# EAGLE board CT_schematic (EAGLE 7.6.0)

Size 100 x 80 mm. Coordinates in mm from the lower left corner, seen from the top.
Outline: 0,0 100,0 100,80 0,80 0,0
Copper layers (1*16): Top 0.035mm / dielectric 1.5mm / Bottom 0.035mm
Design rules "default": minimum track width 10mil, minimum drill 24mil, track to track 8mil, track to pad 8mil, pad to pad 8mil, via to via 8mil, smd to smd 8mil, copper to edge 40mil, drill to drill 8mil, minimum pad ring 10mil, minimum via ring 8mil, stop-mask expansion 4mil, vias tented up to drill 0mil, thermal gap 10mil

## Footprints (pad centres in the part's own frame; a part is rotated, then mirrored left to right if it is on the bottom)
C0603 = smd 0.8 x 0.8: 1 -0.762,0; 2 0.762,0
C0402 = smd 0.5 x 0.5: 1 -0.508,0; 2 0.508,0
C0805 = smd 1.2 x 1.3: 1 -1.016,0; 2 1.016,0
C1210 = smd 1.2 x 2.5: 1 -1.524,0; 2 1.524,0
C1206 = smd 1.3 x 1.6: 1 -1.524,0; 2 1.524,0
DR1040 = smd 1.6 x 3.2: 1 -4.458,0; 2 4.458,0
L1210 = smd 1.2 x 2.5: 1 -1.524,0; 2 1.524,0
R0603 = smd 0.8 x 0.8: 1 -0.762,0; 2 0.762,0
LQFP100 = smd 0.3 x 1.2: 1 -6,-7.75; 2 -5.5,-7.75; 3 -5,-7.75; 4 -4.5,-7.75; 5 -4,-7.75; 6 -3.5,-7.75; 7 -3,-7.75; 8 -2.5,-7.75; 9 -2,-7.75; 10 -1.5,-7.75; 11 -1,-7.75; 12 -0.5,-7.75; 13 0,-7.75; 14 0.5,-7.75; 15 1,-7.75; 16 1.5,-7.75; 17 2,-7.75; 18 2.5,-7.75; 19 3,-7.75; 20 3.5,-7.75; 21 4,-7.75; 22 4.5,-7.75; 23 5,-7.75; 24 5.5,-7.75; 25 6,-7.75; 51 6,7.75; 52 5.5,7.75; 53 5,7.75; 54 4.5,7.75; 55 4,7.75; 56 3.5,7.75; 57 3,7.75; 58 2.5,7.75; 59 2,7.75; 60 1.5,7.75; 61 1,7.75; 62 0.5,7.75; 63 0,7.75; 64 -0.5,7.75; 65 -1,7.75; 66 -1.5,7.75; 67 -2,7.75; 68 -2.5,7.75; 69 -3,7.75; 70 -3.5,7.75; 71 -4,7.75; 72 -4.5,7.75; 73 -5,7.75; 74 -5.5,7.75; 75 -6,7.75 | smd 1.2 x 0.3: 26 7.75,-6; 27 7.75,-5.5; 28 7.75,-5; 29 7.75,-4.5; 30 7.75,-4; 31 7.75,-3.5; 32 7.75,-3; 33 7.75,-2.5; 34 7.75,-2; 35 7.75,-1.5; 36 7.75,-1; 37 7.75,-0.5; 38 7.75,0; 39 7.75,0.5; 40 7.75,1; 41 7.75,1.5; 42 7.75,2; 43 7.75,2.5; 44 7.75,3; 45 7.75,3.5; 46 7.75,4; 47 7.75,4.5; 48 7.75,5; 49 7.75,5.5; 50 7.75,6; 76 -7.75,6; 77 -7.75,5.5; 78 -7.75,5; 79 -7.75,4.5; 80 -7.75,4; 81 -7.75,3.5; 82 -7.75,3; 83 -7.75,2.5; 84 -7.75,2; 85 -7.75,1.5; 86 -7.75,1; 87 -7.75,0.5; 88 -7.75,0; 89 -7.75,-0.5; 90 -7.75,-1; 91 -7.75,-1.5; 92 -7.75,-2; 93 -7.75,-2.5; 94 -7.75,-3; 95 -7.75,-3.5; 96 -7.75,-4; 97 -7.75,-4.5; 98 -7.75,-5; 99 -7.75,-5.5; 100 -7.75,-6
A2200-A = smd 1.5 x 0.8: 1 -4.85,6.35; 2 -4.85,5.08; 3 -4.85,3.81; 4 -4.85,2.54; 5 -4.85,1.27; 6 -4.85,0; 7 -4.85,-1.27; 8 -4.85,-2.54; 9 -4.85,-3.81; 10 -4.85,-5.08; 11 -4.85,-6.35; 12 4.85,-6.35; 13 4.85,-5.08; 14 4.85,-3.81; 15 4.85,-2.54; 16 4.85,-1.27; 17 4.85,0; 18 4.85,1.27; 19 4.85,2.54; 20 4.85,3.81; 21 4.85,5.08; 22 4.85,6.35 | smd 1.2 x 1.2: 23 -2,2; 24 -2,0; 25 -2,-2; 26 0,-2; 27 0,0; 28 0,2; 29 2,2; 30 2,0; 31 2,-2
COAXIAL_C = smd 1 x 1: 1 0,-1.5; 2 0,1.5 | smd 1.05 x 2.2: 3 -1.475,0; 4 1.475,0
SOIC-8 = smd 1.6 x 0.6: 1 -2.7,1.905 | smd 1.55 x 0.6: 2 -2.7,0.635; 3 -2.7,-0.635; 4 -2.7,-1.905; 5 2.7,-1.905; 6 2.7,-0.635; 7 2.7,0.635; 8 2.7,1.905
SAMTEC_FTSH-105-01-L-DV-K = smd 0.762 x 2.794: 1 -2.54,-2.032; 2 -2.54,2.032; 3 -1.27,-2.032; 4 -1.27,2.032; 5 0,-2.032; 6 0,2.032; 7 1.27,-2.032; 8 1.27,2.032; 9 2.54,-2.032; 10 2.54,2.032
182-009-MALE = drill 1.194 pad 1.524 octagon: 1 -5.537,10.923; 2 -2.769,10.923; 3 0,10.923; 4 2.769,10.923; 5 5.537,10.923; 6 -4.153,8.08; 7 -1.384,8.08; 8 1.384,8.08; 9 4.153,8.08 | hole 3.048: -12.446,9.501; 12.446,9.501
SSOP-28 = smd 1.5 x 0.4: 1 -3.625,4.225; 2 -3.625,3.575; 3 -3.625,2.925; 4 -3.625,2.275; 5 -3.625,1.625; 6 -3.625,0.975; 7 -3.625,0.325; 8 -3.625,-0.325; 9 -3.625,-0.975; 10 -3.625,-1.625; 11 -3.625,-2.275; 12 -3.625,-2.925; 13 -3.625,-3.575; 14 -3.625,-4.225; 15 3.625,-4.225; 16 3.625,-3.575; 17 3.625,-2.925; 18 3.625,-2.275; 19 3.625,-1.625; 20 3.625,-0.975; 21 3.625,-0.325; 22 3.625,0.325; 23 3.625,0.975; 24 3.625,1.625; 25 3.625,2.275; 26 3.625,2.925; 27 3.625,3.575; 28 3.625,4.225
FCI_10118193-0001LF = smd 0.4 x 1.35: 1 -1.3,2.675; 2 -0.65,2.675; 3 0,2.675; 4 0.65,2.675; 5 1.3,2.675 | smd 1.6 x 1.4: 6 -3.2,2.45; 7 3.2,2.45 | smd 1.9 x 1.9: 8 -1.2,0; 9 1.2,0 | hole 0.5: -3.3,0; 3.3,0
SOT143B = smd 1 x 0.7: 1 -0.75,-1 | smd 0.6 x 0.7: 2 0.95,-1; 3 0.95,1; 4 -0.95,1
ABLS-25.000MHZ-B2F-T = smd 5.6 x 2.8: 1 -3.81,0; 2 5.69,0
ASEK = smd 1.4 x 1: 1 -1.1,-0.8; 2 1.1,-0.8; 3 1.1,0.8; 4 -1.1,0.8
TSOT-23-5 = smd 1.3 x 0.62: 1 -1.31,0.95; 2 -1.31,0; 3 -1.31,-0.95; 4 1.31,-0.95; 5 1.31,0.95
DFN-8_DDB = smd 0.805 x 0.3: 1 -0.952,0.75; 2 -0.952,0.25; 3 -0.952,-0.25; 4 -0.952,-0.75; 5 0.952,-0.75; 6 0.952,-0.25; 7 0.952,0.25; 8 0.952,0.75 | smd 0.61 x 2.2: 9 0,0
DFN8_2X3MC = smd 0.813 x 0.305: 1 -1.398,0.75; 2 -1.398,0.25; 3 -1.398,-0.25; 4 -1.398,-0.75; 5 1.398,-0.75; 6 1.398,-0.25; 7 1.398,0.25; 8 1.398,0.75 | smd 1.753 x 1.549: 9 0,0
JST-2-SMD = smd 1 x 4.6: 1 -1,-3.7; 2 1,-3.7 | smd 1.6 x 3.4: NC1 -3.4,1.5; NC2 3.4,1.5
SON-6 = smd 0.55 x 0.3: 1 -0.355,0.5 | smd 0.52 x 0.3: 2 -0.37,0; 3 -0.37,-0.5; 4 0.37,-0.5; 5 0.37,0; 6 0.37,0.5
SW_4-1437565-2 = smd 1.4 x 2.1: 1 -2.23,4.55; 2 -2.23,-4.55; 3 2.23,4.55; 4 2.23,-4.55
LGM67K-G1J2-24-Z = smd 0.8 x 1.4: A -2,0; C 0,0
NC7SZ125M5X = smd 1.3 x 0.7: 1 -1.3,0.95; 2 -1.3,0; 3 -1.3,-0.95; 4 1.3,-0.95; 5 1.3,0.95

## Placement (x,y rotation side)
C1  1e-06  [C0603]  -81.28,87.63 0 top  (outside the outline)
C2  1e-07  [C0603]  -85.09,87.63 0 top  (outside the outline)
C3  1e-07  [C0603]  -15.24,92.71 0 top  (outside the outline)
C4  1e-07  [C0603]  -19.05,92.71 0 top  (outside the outline)
C5  1e-07  [C0603]  -22.86,92.71 0 top  (outside the outline)
C6  1e-07  [C0603]  -26.67,92.71 0 top  (outside the outline)
C7  1e-07  [C0603]  -30.48,92.71 0 top  (outside the outline)
C8  4.7e-06  [C0603]  -69.85,87.63 0 top  (outside the outline)
C9  1e-07  [C0603]  -34.29,92.71 0 top  (outside the outline)
C10  1e-08  [C0603]  -38.1,92.71 0 top  (outside the outline)
C11  1e-06  [C0603]  -41.91,92.71 0 top  (outside the outline)
C12  1e-11  [C0402]  -87.63,92.71 0 top  (outside the outline)
C13  1e-11  [C0402]  -15.24,97.79 0 top  (outside the outline)
C14  1e-07  [C0402]  -19.05,97.79 0 top  (outside the outline)
C15  1e-08  [C0402]  -22.86,97.79 0 top  (outside the outline)
C16  1e-07  [C0402]  -26.67,97.79 0 top  (outside the outline)
C17  1e-06  [C0603]  -45.72,92.71 0 top  (outside the outline)
C18  1e-06  [C0603]  -49.53,92.71 0 top  (outside the outline)
C19  1e-07  [C0402]  -30.48,97.79 0 top  (outside the outline)
C20  1e-07  [C0402]  -34.29,97.79 0 top  (outside the outline)
C21  1e-07  [C0402]  -38.1,97.79 0 top  (outside the outline)
C22  1e-07  [C0402]  -41.91,97.79 0 top  (outside the outline)
C23  1e-07  [C0402]  -45.72,97.79 0 top  (outside the outline)
C24  1e-08  [C0402]  -49.53,97.79 0 top  (outside the outline)
C25  1e-05  [C0805]  -34.29,81.28 0 top  (outside the outline)
C26  1e-05  [C0805]  -39.37,81.28 0 top  (outside the outline)
C27  1e-05  [C1210]  -68.58,73.66 0 top  (outside the outline)
C28  2.2e-06  [C0603]  -73.66,87.63 0 top  (outside the outline)
C29  2.2e-07  [C0603]  -77.47,87.63 0 top  (outside the outline)
C30  1e-07  [C0402]  -53.34,97.79 0 top  (outside the outline)
C31  1e-05  [C1206]  -81.28,73.66 0 top  (outside the outline)
C32  1e-05  [C1206]  -87.63,73.66 0 top  (outside the outline)
C33  1e-08  [C0402]  -57.15,97.79 0 top  (outside the outline)
C34  1e-08  [C0402]  -60.96,97.79 0 top  (outside the outline)
C35  1e-08  [C0402]  -64.77,97.79 0 top  (outside the outline)
I1  2.5e-06  [DR1040]  -80.01,49.53 0 top  (outside the outline)
I2  1e-05  [L1210]  -74.93,73.66 0 top  (outside the outline)
R2  1000.0  [R0603]  -53.34,92.71 0 top  (outside the outline)
R4  4700.0  [R0603]  -57.15,92.71 0 top  (outside the outline)
R5  4700.0  [R0603]  -60.96,92.71 0 top  (outside the outline)
R6  2200.0  [R0603]  -64.77,92.71 0 top  (outside the outline)
R7  2200.0  [R0603]  -68.58,92.71 0 top  (outside the outline)
R8  10000.0  [R0603]  -87.63,81.28 0 top  (outside the outline)
R9  10000.0  [R0603]  -15.24,87.63 0 top  (outside the outline)
R10  10000.0  [R0603]  -20.32,87.63 0 top  (outside the outline)
R11  10000.0  [R0603]  -25.4,87.63 0 top  (outside the outline)
R12  10000.0  [R0603]  -30.48,87.63 0 top  (outside the outline)
R13  10000.0  [R0603]  -35.56,87.63 0 top  (outside the outline)
R14  10000.0  [R0603]  -40.64,87.63 0 top  (outside the outline)
R15  10000.0  [R0603]  -45.72,87.63 0 top  (outside the outline)
R16  10000.0  [R0603]  -50.8,87.63 0 top  (outside the outline)
R17  5.0  [R0603]  -72.39,92.71 0 top  (outside the outline)
R18  120.0  [R0603]  -76.2,92.71 0 top  (outside the outline)
R19  100000.0  [R0603]  -57.15,81.28 0 top  (outside the outline)
R20  220000.0  [R0603]  -62.23,81.28 0 top  (outside the outline)
R21  1000000.0  [R0603]  -52.07,81.28 0 top  (outside the outline)
R22  100000.0  [R0603]  -67.31,81.28 0 top  (outside the outline)
R23  560000.0  [R0603]  -72.39,81.28 0 top  (outside the outline)
R24  10000.0  [R0603]  -55.88,87.63 0 top  (outside the outline)
R25  10000.0  [R0603]  -60.96,87.63 0 top  (outside the outline)
R26  9100.0  [R0603]  -80.01,92.71 0 top  (outside the outline)
R27  680000.0  [R0603]  -77.47,81.28 0 top  (outside the outline)
R28  120000.0  [R0603]  -82.55,81.28 0 top  (outside the outline)
R29  2000.0  [R0603]  -83.82,92.71 0 top  (outside the outline)
R30  10000.0  [R0603]  -66.04,87.63 0 top  (outside the outline)
U1  STM32L475VGT6  [LQFP100]  -76.2,31.75 0 top  (outside the outline)
U2  A2200-A  [A2200-A]  -58.42,31.75 0 top  (outside the outline)
U3  73412-0114  [COAXIAL_C]  -77.47,63.5 0 top  (outside the outline)
U4  AT25M02-SSHD-T  [SOIC-8]  -39.37,64.77 0 top  (outside the outline)
U5  FTSH-105-01-L-DV-K  [SAMTEC_FTSH-105-01-L-DV-K]  -48.26,52.07 0 top  (outside the outline)
U6  MCP2562-E/SN  [SOIC-8]  -53.34,64.77 0 top  (outside the outline)
U7  182-009-113R531  [182-009-MALE]  -36.83,6.35 0 top  (outside the outline)
U8  ST3241EBPR  [SSOP-28]  -19.05,52.07 0 top  (outside the outline)
U9  182-009-113R531  [182-009-MALE]  -36.83,27.94 0 top  (outside the outline)
U10  10118193-0001LF  [FCI_10118193-0001LF]  -63.5,63.5 0 top  (outside the outline)
U11  prtr5v0u2ax  [SOT143B]  -83.82,97.79 0 top  (outside the outline)
U12  ABLS-25.000MHZ-B2F-T  [ABLS-25.000MHZ-B2F-T]  -45.72,74.93 0 top  (outside the outline)
U13  ASEK-32.768KHz-ECST  [ASEK]  -29.21,74.93 0 top  (outside the outline)
U14  ltc3406es5  [TSOT-23-5]  -44.45,81.28 0 top  (outside the outline)
U15  LT3494AEDDB#TRMPBF  [DFN-8_DDB]  -68.58,97.79 0 top  (outside the outline)
U16  MCP73831T-2ACI/MC  [DFN8_2X3MC]  -20.32,101.6 0 top  (outside the outline)
U17  S2B-PH-SM4-TB(LF)(SN)  [JST-2-SMD]  -22.86,66.04 0 top  (outside the outline)
U18  TPS3895ADRYR  [SON-6]  -13.97,101.6 0 top  (outside the outline)
U19  4-1437565-2  [SW_4-1437565-2]  -69.85,49.53 0 top  (outside the outline)
U20  Q65110A2395  [LGM67K-G1J2-24-Z]  -57.15,73.66 0 top  (outside the outline)
U21  nc7sz125m5x  [NC7SZ125M5X]  -15.24,81.28 0 top  (outside the outline)
U22  nc7sz125m5x  [NC7SZ125M5X]  -21.59,81.28 0 top  (outside the outline)
U23  nc7sz125m5x  [NC7SZ125M5X]  -27.94,81.28 0 top  (outside the outline)

## Library data of the parts
C1-C35 I1 I2 R2 R4-R30 U1-U23 = circuit_tree

## Nets
CLK_CRYSTAL_U1_12: C12.1 U1.12 U12.1
CLK_CRYSTAL_U1_13: C13.1 U1.13 U12.2
CLK_U1_8: U1.8 U13.3
GND: C1.2 C2.2 C3.2 C4.2 C5.2 C6.2 C7.2 C8.2 C9.2 C10.2 C11.2 C12.2 C13.2 C14.2 C15.2 C16.2 C17.2 C18.2 C19.2 C22.2 C23.2 C24.2 C25.2 C26.1 C26.2 C27.2 C28.2 C29.2 C30.2 C31.2 C32.2 C33.2 C34.2 C35.2 R2.2 R8.2 R16.2 R17.2 R20.2 R26.2 R28.2 R29.2 U1.10 U1.19 U1.20 U1.27 U1.49 U1.74 U1.99 U2.7 U2.8 U2.23 U2.24 U2.25 U2.26 U2.27 U2.28 U2.29 U2.30 U2.31 U4.4 U5.3 U5.5 U6.2 U6.8 U7.5 U8.23 U8.25 U9.5 U10.5 U10.6 U10.7 U10.8 U10.9 U11.1 U13.2 U14.2 U15.2 U15.9 U16.6 U16.9 U17.2 U18.2 U20.C U21.2 U21.3 U22.1 U22.3 U23.1 U23.3
INPUT_USBPOWER_5V: C31.1 R30.2 U1.68 U10.1 U11.4 U16.1 U16.2
NET_U1_14: R5.1 U1.14 U23.4
NET_U1_92: R6.1 U1.92 U2.15
NET_U1_93: R7.1 U1.93 U2.16
NET_U1_94: R8.1 U1.94
NET_U1_97: U20.A
NET_U1_98: U19.3 U19.4
NET_U2_2: R9.2 U2.2
NET_U2_6: U2.6
NET_U2_17: R9.1 U2.17
NET_U2_19: U2.19
NET_U2_22: R4.1 U2.22 U22.4
NET_U3_1: U2.11 U3.1
NET_U3_2: U2.10 U3.2 U3.3 U3.4
NET_U4_3: R10.1 U4.3
NET_U4_7: R12.1 U4.7
NET_U5_9: R17.1 U5.9
NET_U6_6: R18.2 U6.6
NET_U7_2: R18.2 U6.6 U7.2
NET_U7_3: R18.1 U6.7 U7.3
NET_U8_1: C21.1 U8.1
NET_U8_2: C21.2 U8.2
NET_U8_3: C23.1 U8.3
NET_U8_22: R19.1 U8.22
NET_U8_24: C20.2 U8.24
NET_U8_27: C22.1 U8.27
NET_U8_28: C20.1 U8.28
NET_U9_2: U8.4 U9.2
NET_U9_3: U8.9 U9.3
NET_U9_7: U8.5 U9.7
NET_U9_8: U8.10 U9.8
NET_U14_1: U14.1
NET_U14_3: I1.1 U14.3
NET_U14_5: R20.1 R21.1 U14.5
NET_U14_ATNET_3: I1.2 R21.2
NET_U15_1: I2.1 U15.1
NET_U15_5: R22.1 U15.5
NET_U15_6: R23.1 U15.6
NET_U15_8: C29.1 U15.8
NET_U16_5: R30.1 U16.5
NET_U16_8: R29.1 U16.8
NET_U18_1: R25.1 R26.1 U18.1
NET_U18_3: R27.2 R28.1 U18.3
NET_U18_4: R24.1 U18.4 U21.4 U22.2 U23.2
NET_U19_1: R2.1 U19.1 U19.2
PROC_CAN1_RX: U1.81 U6.4
PROC_CAN1_TX: U1.82 U6.1
PROC_LPUART1_CTS: U1.52 U8.13
PROC_LPUART1_RTS: U1.51 U8.18
PROC_LPUART1_RX: U1.15 U8.19
PROC_LPUART1_TX: U1.16 U8.14
PROC_SPI1_MISO: U1.31 U4.2
PROC_SPI1_MOSI: U1.32 U4.5
PROC_SPI1_NSS: R11.1 U1.29 U4.1
PROC_SPI1_SCK: U1.30 U4.6
PROC_SYS_JTCK_SWCLK: R16.1 U1.76 U5.4
PROC_SYS_JTDI: R14.1 U1.77 U5.8
PROC_SYS_JTDO_SWO: U1.89 U5.6
PROC_SYS_JTMS_SWDIO: R15.1 U1.72 U5.2
PROC_USB_OTG_FS_DM: U1.70 U10.2 U11.3
PROC_USB_OTG_FS_DP: U1.71 U10.3 U11.2
RST_OUT_U5_JTAG_RST_B: R13.1 U5.10 U21.1
VCC_S1_3V7: C25.1 C27.1 C32.1 I2.2 R22.2 U14.4 U15.3 U15.4 U16.3 U16.4 U17.1
VCC_TIER1_3V3: C1.1 C2.1 C3.1 C4.1 C5.1 C6.1 C7.1 C8.1 C9.1 C10.1 C11.1 C14.1 C15.1 C16.1 C18.1 C19.1 C24.1 C26.2 C30.1 C33.1 C34.1 C35.1 I1.2 R4.2 R5.2 R6.2 R7.2 R10.2 R11.2 R12.2 R13.2 R14.2 R15.2 R19.2 R21.2 R24.2 R25.2 R27.1 U1.6 U1.11 U1.21 U1.22 U1.28 U1.50 U1.73 U1.75 U1.100 U2.20 U4.8 U5.1 U6.5 U8.26 U13.4 U18.6 U21.5 U22.5 U23.5
VCC_TIER1_5V0: C17.1 C28.1 R23.2 U6.3 U15.7

## Tracks (layer width: path | path; a pad name or v marks a point on that pad's centre or on a via)
CLK_CRYSTAL_U1_12  (2 unrouted)
CLK_CRYSTAL_U1_13  (2 unrouted)
CLK_U1_8  (1 unrouted)
GND  (89 unrouted)
INPUT_USBPOWER_5V  (6 unrouted)
NET_U1_14  (2 unrouted)
NET_U1_92  (2 unrouted)
NET_U1_93  (2 unrouted)
NET_U1_94  (1 unrouted)
NET_U1_98  (1 unrouted)
NET_U2_2  (1 unrouted)
NET_U2_17  (1 unrouted)
NET_U2_22  (2 unrouted)
NET_U3_1  (1 unrouted)
NET_U3_2  (3 unrouted)
NET_U4_3  (1 unrouted)
NET_U4_7  (1 unrouted)
NET_U5_9  (1 unrouted)
NET_U6_6  (1 unrouted)
NET_U7_2  (2 unrouted)
NET_U7_3  (2 unrouted)
NET_U8_1  (1 unrouted)
NET_U8_2  (1 unrouted)
NET_U8_3  (1 unrouted)
NET_U8_22  (1 unrouted)
NET_U8_24  (1 unrouted)
NET_U8_27  (1 unrouted)
NET_U8_28  (1 unrouted)
NET_U9_2  (1 unrouted)
NET_U9_3  (1 unrouted)
NET_U9_7  (1 unrouted)
NET_U9_8  (1 unrouted)
NET_U14_3  (1 unrouted)
NET_U14_5  (2 unrouted)
NET_U14_ATNET_3  (1 unrouted)
NET_U15_1  (1 unrouted)
NET_U15_5  (1 unrouted)
NET_U15_6  (1 unrouted)
NET_U15_8  (1 unrouted)
NET_U16_5  (1 unrouted)
NET_U16_8  (1 unrouted)
NET_U18_1  (2 unrouted)
NET_U18_3  (2 unrouted)
NET_U18_4  (4 unrouted)
NET_U19_1  (2 unrouted)
PROC_CAN1_RX  (1 unrouted)
PROC_CAN1_TX  (1 unrouted)
PROC_LPUART1_CTS  (1 unrouted)
PROC_LPUART1_RTS  (1 unrouted)
PROC_LPUART1_RX  (1 unrouted)
PROC_LPUART1_TX  (1 unrouted)
PROC_SPI1_MISO  (1 unrouted)
PROC_SPI1_MOSI  (1 unrouted)
PROC_SPI1_NSS  (2 unrouted)
PROC_SPI1_SCK  (1 unrouted)
PROC_SYS_JTCK_SWCLK  (2 unrouted)
PROC_SYS_JTDI  (2 unrouted)
PROC_SYS_JTDO_SWO  (1 unrouted)
PROC_SYS_JTMS_SWDIO  (2 unrouted)
PROC_USB_OTG_FS_DM  (2 unrouted)
PROC_USB_OTG_FS_DP  (2 unrouted)
RST_OUT_U5_JTAG_RST_B  (2 unrouted)
VCC_S1_3V7  (10 unrouted)
VCC_TIER1_3V3  (56 unrouted)
VCC_TIER1_5V0  (4 unrouted)